# Altium PCB Switcher.PcbDoc
Units mil, origin at the board's own origin, x right, y up, seen from the top; angles counter-clockwise.
Board outline 1565 x 1640 mil, 2 copper layers (Top Layer, Bottom Layer); 3 components, 4 nets, 33 pads, 0 vias.
Unrouted connection lines stored in the file: 4.
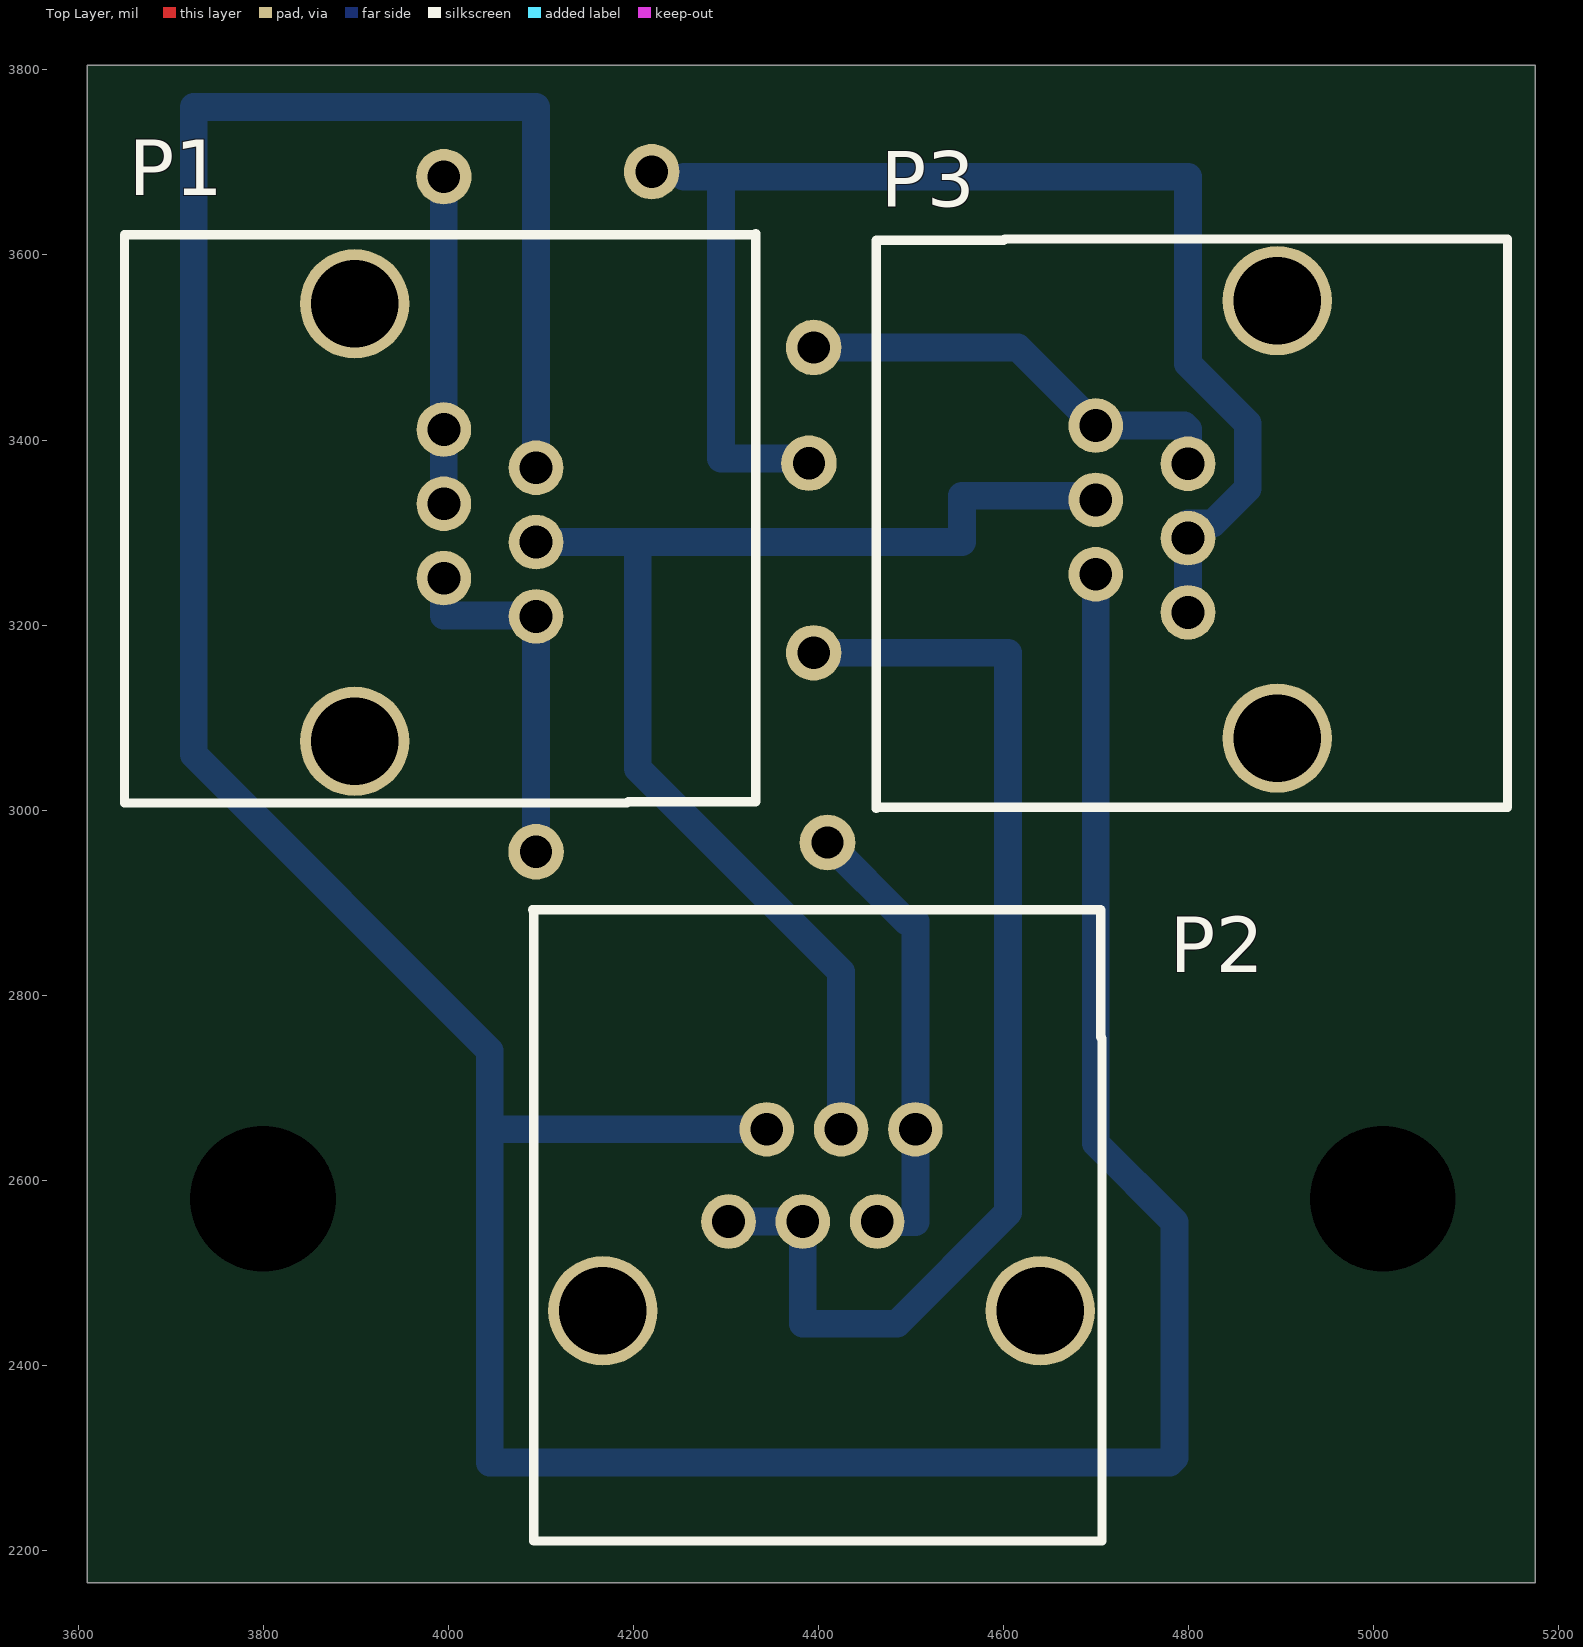
[diagram p0: Top Layer view]
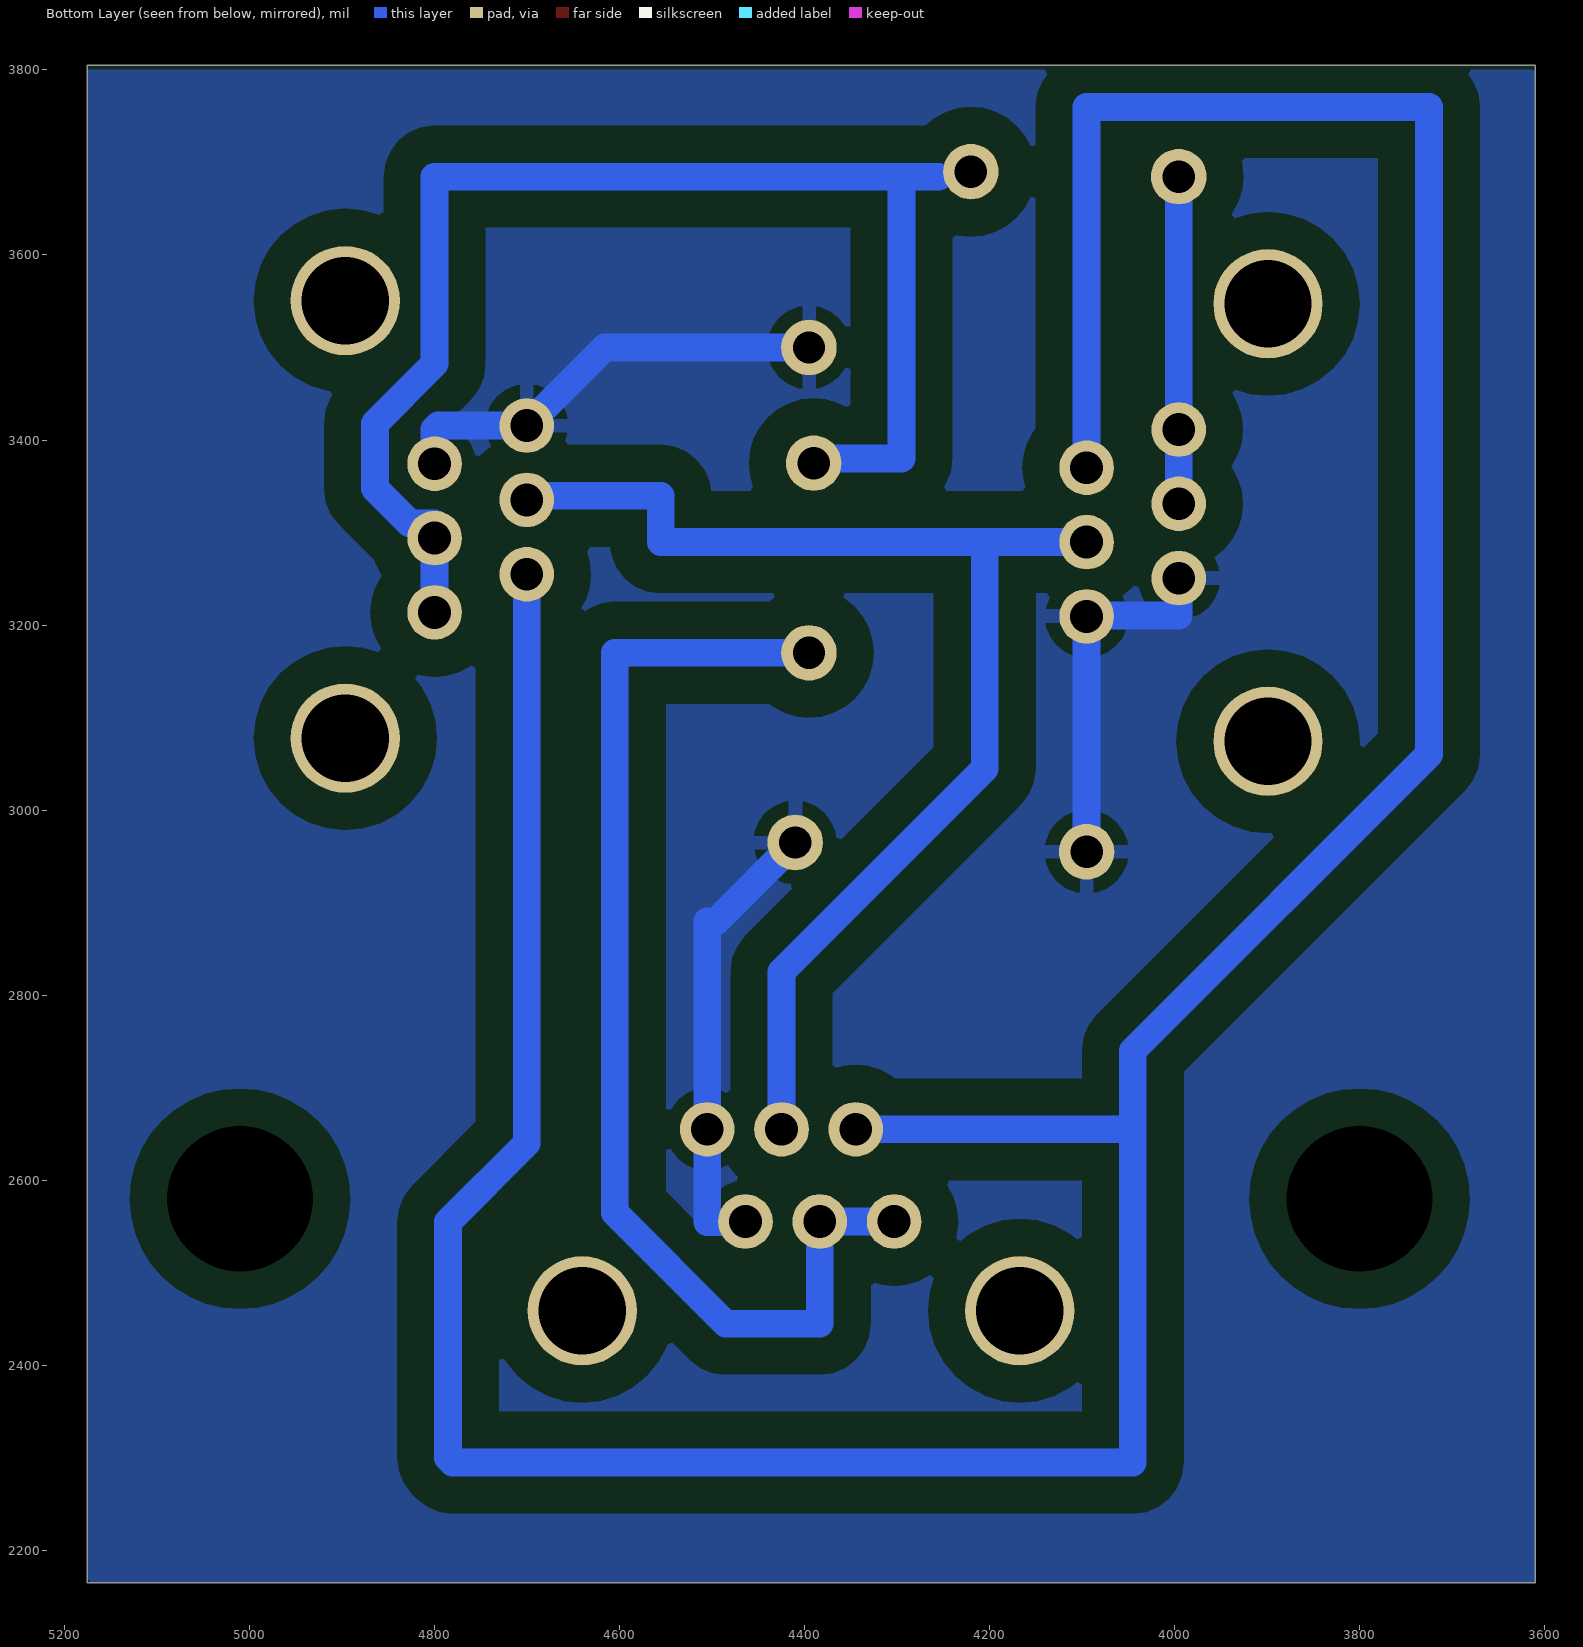
[diagram p1: Bottom Layer view, seen from below]
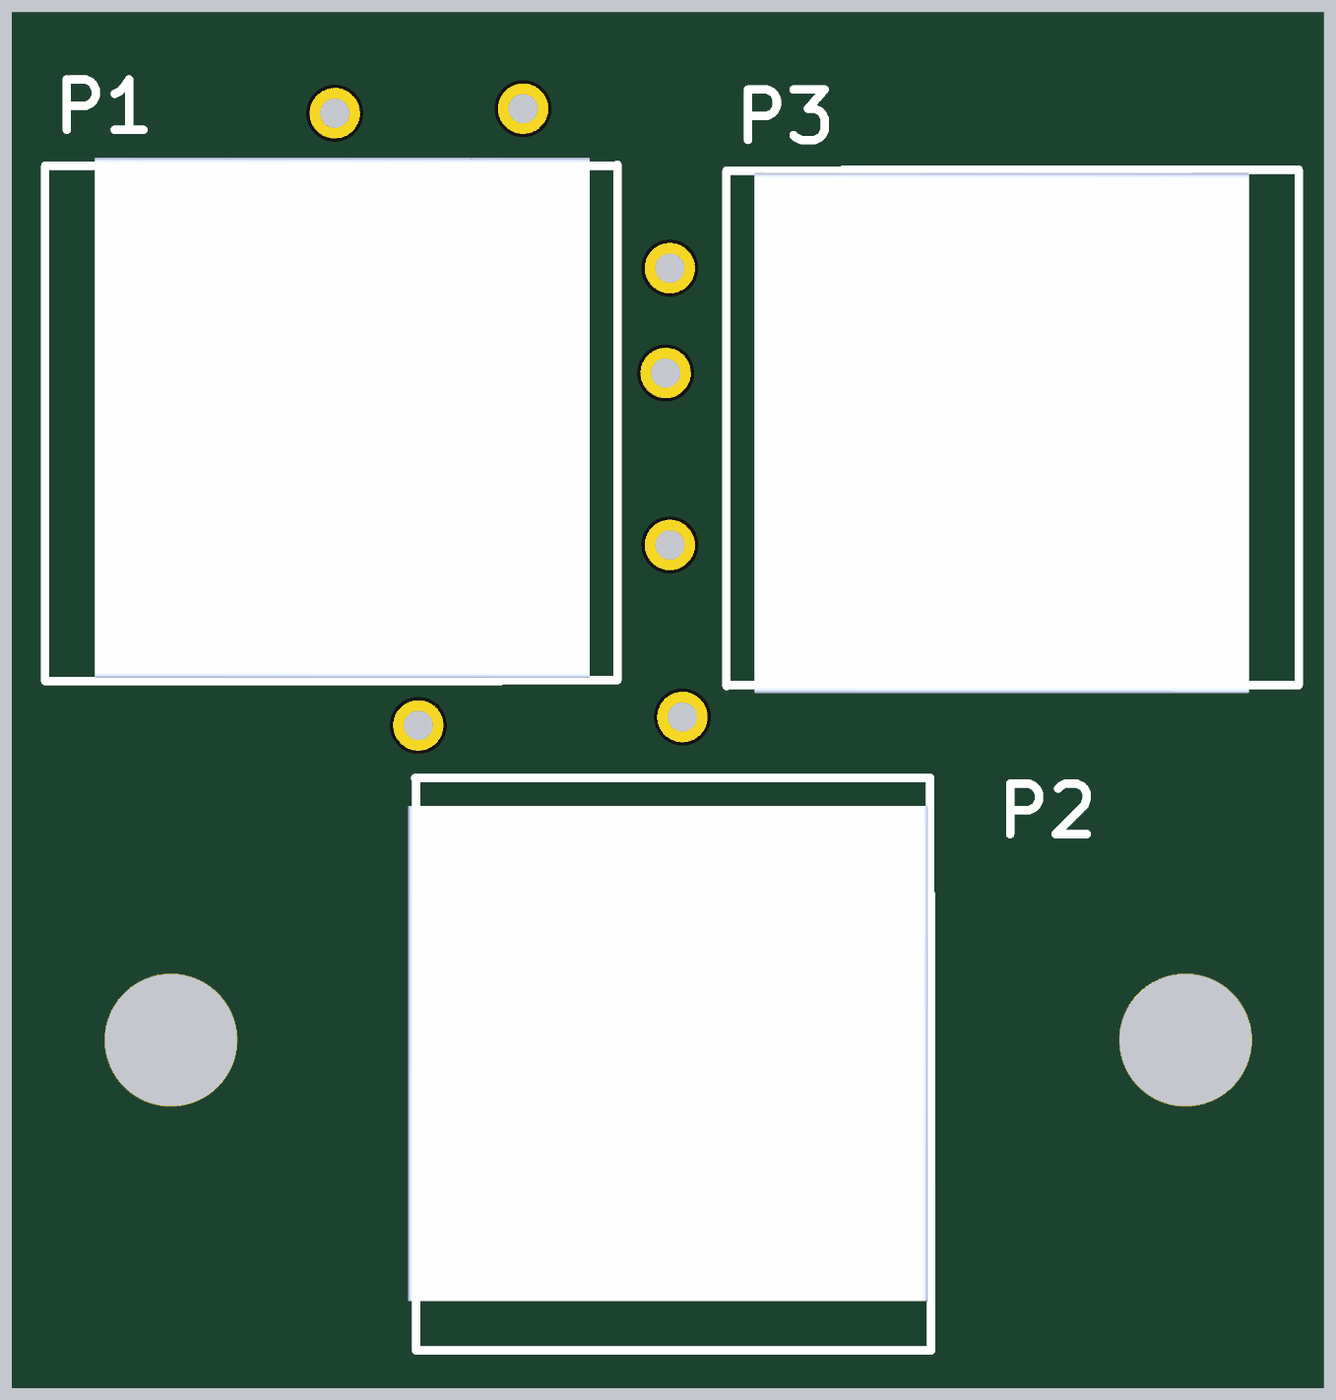
[diagram p2: 3D render of the assembled board from above, using the file's embedded part models]

## Layer stack, top to bottom
Top Solder: solder mask 0.4, Solder Resist, Dk 3.5
Top Layer: signal copper 1.4
Dielectric 1: dielectric 12.6, FR-4, Dk 4.8
Bottom Layer: signal copper 1.4
Bottom Solder: solder mask 0.4, Solder Resist, Dk 3.5

## Board outline
3610,2165 5175,2165 5175,3805 3610,3805

## Design rules (kind name [scope] priority, off if disabled: settings)
Clearance [All] p1: gap=40 ignorepadtopadclearanceinfootprint=FALSE
PolygonConnect [All] p1: connectstyle=Relief reliefconductorwidth=15 reliefentries=4 polygonreliefangle="90 Angle" airgapwidth=15
RoutingLayers [All] p1: top layer_v5=FALSE bottom layer_v5=TRUE
RoutingVias [All] p1: holewidth=30 width=80 viastyle="Through Hole" minholewidth=30 minwidth=80 maxholewidth=30 maxwidth=80
SolderMaskExpansion [All] p1: expansion=4
Width [All] p1: maxlimit=30 minlimit=20 preferedwidth=30
29 further rules are at their usual default settings.

## Components (designator, comment, footprint, x,y, rotation, side; value= is the part's Value field where it differs from the comment)
P1 "Header 8" RJ11 4095,3370 r270 top
P2 "Header 8" RJ11 4344.37,2655 r0 top
P3 "Header 8" RJ11 4700,3255 r90 top

## Footprints (in the part's own frame and the unit in brackets; to place one, negate y for a bottom-side part, rotate by r counter-clockwise, add the part's x,y. Pads: shape width x height; smd on the part's side, far side on the other; paste and mask are expansions set on the pad)
RJ11 [mm] "DIP 20, 20 PIN, W 300mil, Pin to pin 100mil"
  round 1.5 hole 0.9: 1(0,0) 2(2.04,0) 3(4.08,0) 4(-1.05,-2.53) 5(0.99,-2.53) 6(3.03,-2.53)
  round 3 hole 2.4: 7(-4.5,-4.98) 8(7.51,-4.98)
  silkscreen extent -6.43,-11.3 9.2,6.03, body extent -6.71,-9.8 9.11,5.19, height 12.87

## Part data
P1 P2 P3: "Header, 8-Pin", LatestRevisionDate=17-Jul-2002, LatestRevisionNote="Re-released for DXP Platform.", Publisher="Altium Limited"

## Free pads (board coordinates)
  round 60 hole 35: 7(3995.39,3684.61) 8(4390,3375) 9(4395,3170) 10(4220,3690) 11(4395,3500) 12(4410,2965) 13(4095,2955)
  round 60 hole 157.48: 14(3800,2580) 15(5010,2580)

## Nets (pads, with @x,y where several pads share a name; then routed paths per layer and width w, separated by ;. In a path a pad name is that pad's centre, name@x,y a point inside that pad or via, vN(x,y) a via of type N, cw(c..) or ccw(c..) an arc to the next point about the centre after c; other vN are vias at no path point)
12V: P1.4 P1.5 P2.4 P2.5 P3.4 P3.5 pad.7 pad.8 pad.9 pad.10 | length 3107
  Bottom Layer w30: P1.5 P1.4 pad.7 ; 4255,3684.61 4295,3684.61 ; P2.4 P2.5 4383.35,2445 4485,2445 4605,2565 4605,3170 pad.9@4405,3170 ; pad.8 4385,3380 4295,3380 4295,3684.61 ; P3.4 P3.5 4799.61,3309.76 4826.33,3309.76 4864.13,3347.56 4864.13,3417.84 4799.61,3482.36 4799.61,3684.61 4295,3684.61
A: P1.1 P2.1 P3.1 | length 4403.3
  Bottom Layer w30: P1.1 4095,3760 3725,3760 3725,3060 4045,2740 4045,2655 ; P2.1@4334.37,2665 P2.1 4045,2655 ; P3.1 4700,2640 4785,2555 4785,2300 4780,2295 4045,2295 4045,2655
B: P1.2 P2.2 P3.2 | length 1382.5
  Bottom Layer w30: P1.2 4205,3289.69 ; P2.2 4424.69,2825.31 4205,3045 4205,3289.69 ; P3.2 4695.63,3339.69 4555.31,3339.69 4555.31,3289.69 4205,3289.69
GND: P1.3 P1.6 P2.3 P2.6 P3.3 P3.6 pad.11 pad.12 pad.13 | length 1360
  Bottom Layer w30: P1.6 3995.39,3210.39 4093.98,3210.39 P1.3 pad.13 ; pad.11@4405,3500 4615.63,3500 P3.3 4795.63,3415.63 4799.61,3411.65 P3.6 ; pad.12 4495,2880 4505,2880 P2.3 4505,2555 4464.06,2555 P2.6
pads on no net: P1.7 P1.8 P2.7 P2.8 P3.7 P3.8

## Polygon pours and split planes (outlines as drawn)
GND on Bottom Layer "bot" (solid, pour order 2): 3610,3805 3615,3800 5175,3800 5175,2170 5170,2165 3610,2165